# EAGLE board pi_gps_header (EAGLE 7.7.0)
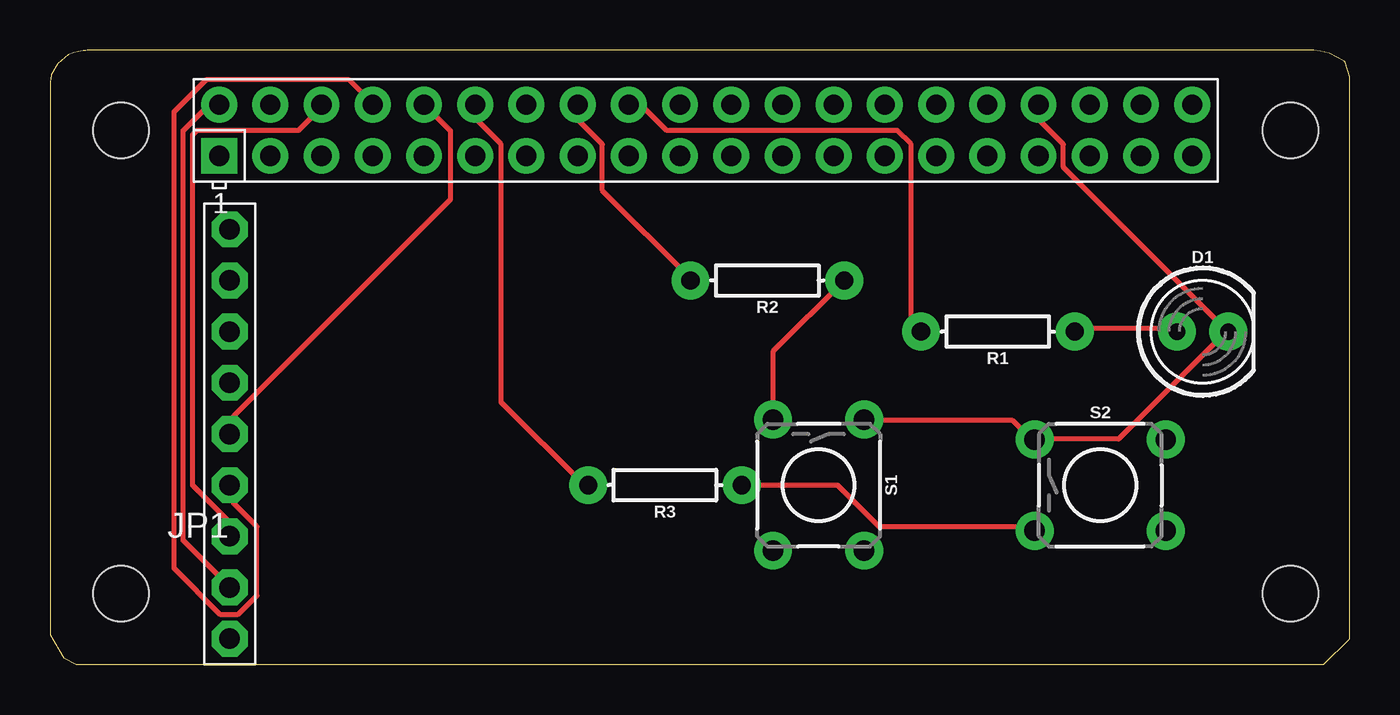
[diagram p0: board, top side]
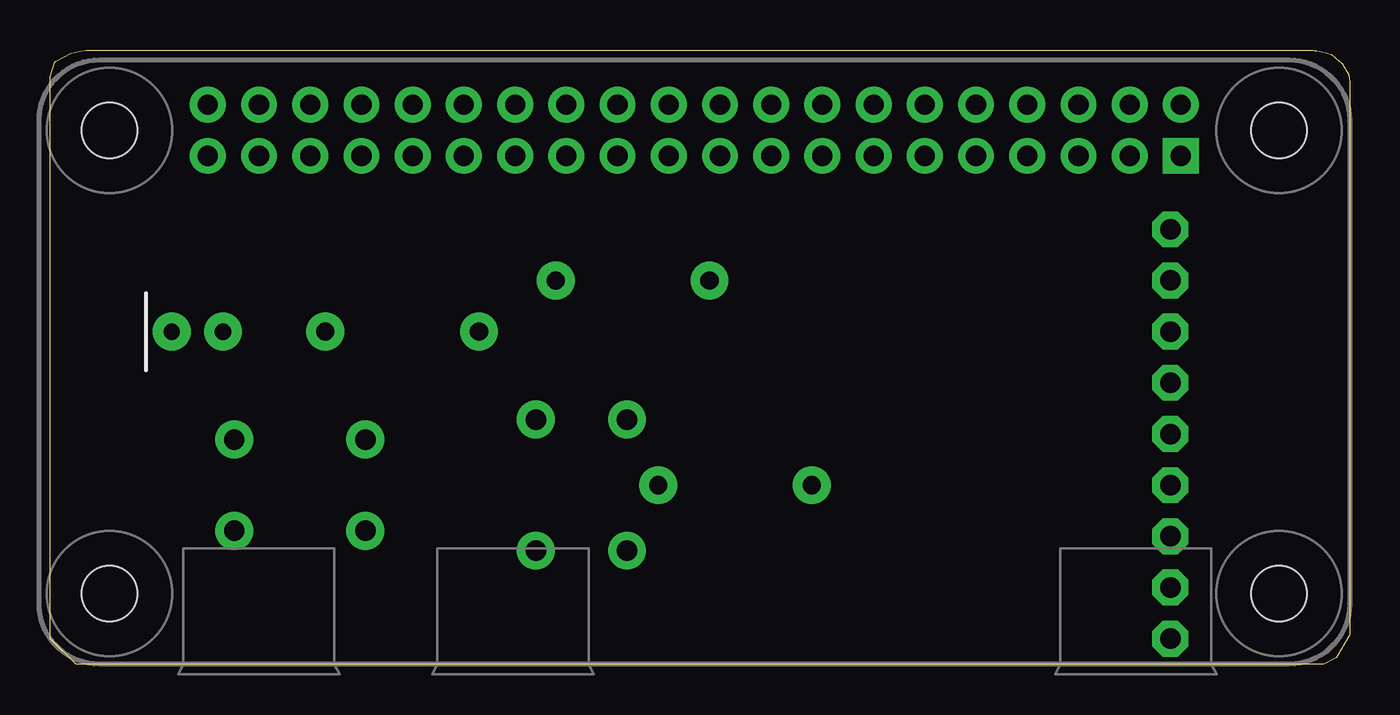
[diagram p1: board, bottom side, seen from below]

Size 64.44 x 30.47 mm. Coordinates in mm from the lower left corner, seen from the top.
Outline: 62.67,30.47 1.91,30.47 1.87,30.47 1.83,30.47 1.75,30.47 1.63,30.45 1.52,30.44 1.38,30.41 1.16,30.36 0.87,30.25 0.37,29.81 0.03,29.26 0.01,29.05 0,28.95 0,28.89 0,28.86 0,1.45 0.67,0.33 1.29,0 63.17,0 64.44,1.27 64.44,29.17 64.23,29.87 64.17,29.92 63.43,30.32 62.98,30.43 62.67,30.47
Copper layers (1*16): Top 0.035mm / dielectric 1.5mm / Bottom 0.035mm
Design rules "default": minimum track width 10mil, minimum drill 24mil, track to track 8mil, track to pad 8mil, pad to pad 8mil, via to via 8mil, smd to smd 8mil, copper to edge 40mil, drill to drill 8mil, minimum pad ring 10mil, minimum via ring 8mil, stop-mask expansion 4mil, vias tented up to drill 0mil, thermal gap 10mil

## Footprints (pad centres in the part's own frame; a part is rotated, then mirrored left to right if it is on the bottom)
LED_5MM = drill 0.813 pad 1.88: A -1.27,0; K 1.27,0
1X09-BIG = drill 1.016 pad 1.778 octagon: 1 -10.16,0; 2 -7.62,0; 3 -5.08,0; 4 -2.54,0; 5 0,0; 6 2.54,0; 7 5.08,0; 8 7.62,0; 9 10.16,0
AXIAL-0.3 = drill 0.9 pad 1.88: P$1 -3.81,0; P$2 3.81,0
TACTILE_SWITCH_PTH_6.0MM = drill 1.016 pad 1.88: 1 -3.251,2.261; 2 3.251,2.261; 3 -3.251,-2.261; 4 3.251,-2.261
RASPBERRYPI_BASTELSTUBE_V13_RASPI_BOARD_B+_FULL = drill 1 pad 1.778 square: 1 8.37,25.23 | drill 1 pad 1.778: 2 8.37,27.77; 3 10.91,25.23; 4 10.91,27.77; 5 13.45,25.23; 6 13.45,27.77; 7 15.99,25.23; 8 15.99,27.77; 9 18.53,25.23; 10 18.53,27.77; 11 21.07,25.23; 12 21.07,27.77; 13 23.61,25.23; 14 23.61,27.77; 15 26.15,25.23; 16 26.15,27.77; 17 28.69,25.23; 18 28.69,27.77; 19 31.23,25.23; 20 31.23,27.77; 21 33.77,25.23; 22 33.77,27.77; 23 36.31,25.23; 24 36.31,27.77; 25 38.85,25.23; 26 38.85,27.77; 27 41.39,25.23; 28 41.39,27.77; 29 43.93,25.23; 30 43.93,27.77; 31 46.47,25.23; 32 46.47,27.77; 33 49.01,25.23; 34 49.01,27.77; 35 51.55,25.23; 36 51.55,27.77; 37 54.09,25.23; 38 54.09,27.77; 39 56.63,25.23; 40 56.63,27.77 | hole 2.75: 3.5,3.5; 3.5,26.5; 61.5,3.5; 61.5,26.5

## Placement (x,y rotation side)
D1  [LED_5MM]  57.15,16.51 0 top
JP1  [1X09-BIG]  8.89,11.43 90 top
R1  10  [AXIAL-0.3]  46.99,16.51 180 top
R2  10  [AXIAL-0.3]  35.56,19.05 180 top
R3  10  [AXIAL-0.3]  30.48,8.89 180 top
S1  MOMENTARY-SWITCH-SPST-PTH-6.0MM  [TACTILE_SWITCH_PTH_6.0MM]  38.1,8.89 270 top
S2  MOMENTARY-SWITCH-SPST-PTH-6.0MM  [TACTILE_SWITCH_PTH_6.0MM]  52.07,8.89 0 top
U$1  RPI-ZERO  [RASPBERRYPI_BASTELSTUBE_V13_RASPI_BOARD_B+_FULL]  0,0 0 top

## Library data of the parts
D1 = SparkFun-LED
JP1 = adafruit
R1-R3 = SparkFun-Resistors; PROD_ID: RES-12180
S1 S2 = SparkFun-Switches; PROD_ID: SWCH-08441; SF_SKU: COM-00097
U$1 = RPI-Zero

## Nets
5V0@1: JP1.2 U$1.2
GND@7: D1.K S1.1 S2.1 U$1.34
GND@8: JP1.3 U$1.6
N$1: JP1.4 U$1.8
N$2: JP1.5 U$1.10
N$3: R3.P$2 U$1.12
N$4: R2.P$2 U$1.16
N$5: R1.P$2 U$1.18
N$6: D1.A R1.P$1
N$7: R3.P$1 S2.3
N$8: R2.P$1 S1.3

## Tracks (layer width: path | path; a pad name or v marks a point on that pad's centre or on a via)
5V0@1
  Top 0.254: U$1.2 8.18,27.64 7.72,27.64 6.58,26.49 6.58,6.15 8.87,3.86 JP1.2
GND@7
  Top 0.254: S1.1 40.41,12.09 47.73,12.09 48.64,11.18 S2.1 48.87,11.18 52.98,11.18 58.24,16.43 D1.K 58.24,16.66 50.24,24.66 50.24,25.81 49.1,26.95 49.1,27.64 U$1.34
GND@8
  Top 0.254: JP1.3 8.87,6.37 8.87,7.06 7.04,8.89 7.04,26.26 7.26,26.49 12.29,26.49 13.44,27.64 U$1.6
N$1
  Top 0.254: JP1.4 9.09,8.89 9.09,7.98 10.24,6.83 10.24,3.4 9.32,2.49 8.41,2.49 6.12,4.78 6.12,27.41 7.72,29.01 14.81,29.01 15.95,27.86 U$1.8
N$2
  Top 0.254: JP1.5 9.09,11.63 9.09,12.32 19.84,23.06 19.84,26.49 18.69,27.64 U$1.10
N$3
  Top 0.254: U$1.12 21.21,27.64 21.21,26.95 22.35,25.81 22.35,13 26.47,8.89 R3.P$2
N$4
  Top 0.254: U$1.16 26.24,27.64 26.24,26.95 27.38,25.81 27.38,23.52 31.73,19.18 R2.P$2
N$5
  Top 0.254: U$1.18 28.75,27.64 29.44,27.64 30.58,26.49 42.01,26.49 42.7,25.81 42.7,17.12 43.16,16.66 R1.P$2
N$6
  Top 0.254: R1.P$1 50.93,16.66 55.73,16.66 D1.A
N$7
  Top 0.254: R3.P$1 39.04,8.89 41.1,6.83 48.64,6.83 S2.3
N$8
  Top 0.254: S1.3 35.84,15.52 R2.P$1